# Altium PCB betrusted_evtx.PcbDoc (part 1 of 2)
Units mm, origin at the board's own origin, x right, y up, seen from the top; angles counter-clockwise.
Board outline 66 x 88 mm, 2 copper layers (Top Layer, Bottom Layer), stack 0.781 mm thick; 108 components, 62 nets, 1117 pads, 87 vias.
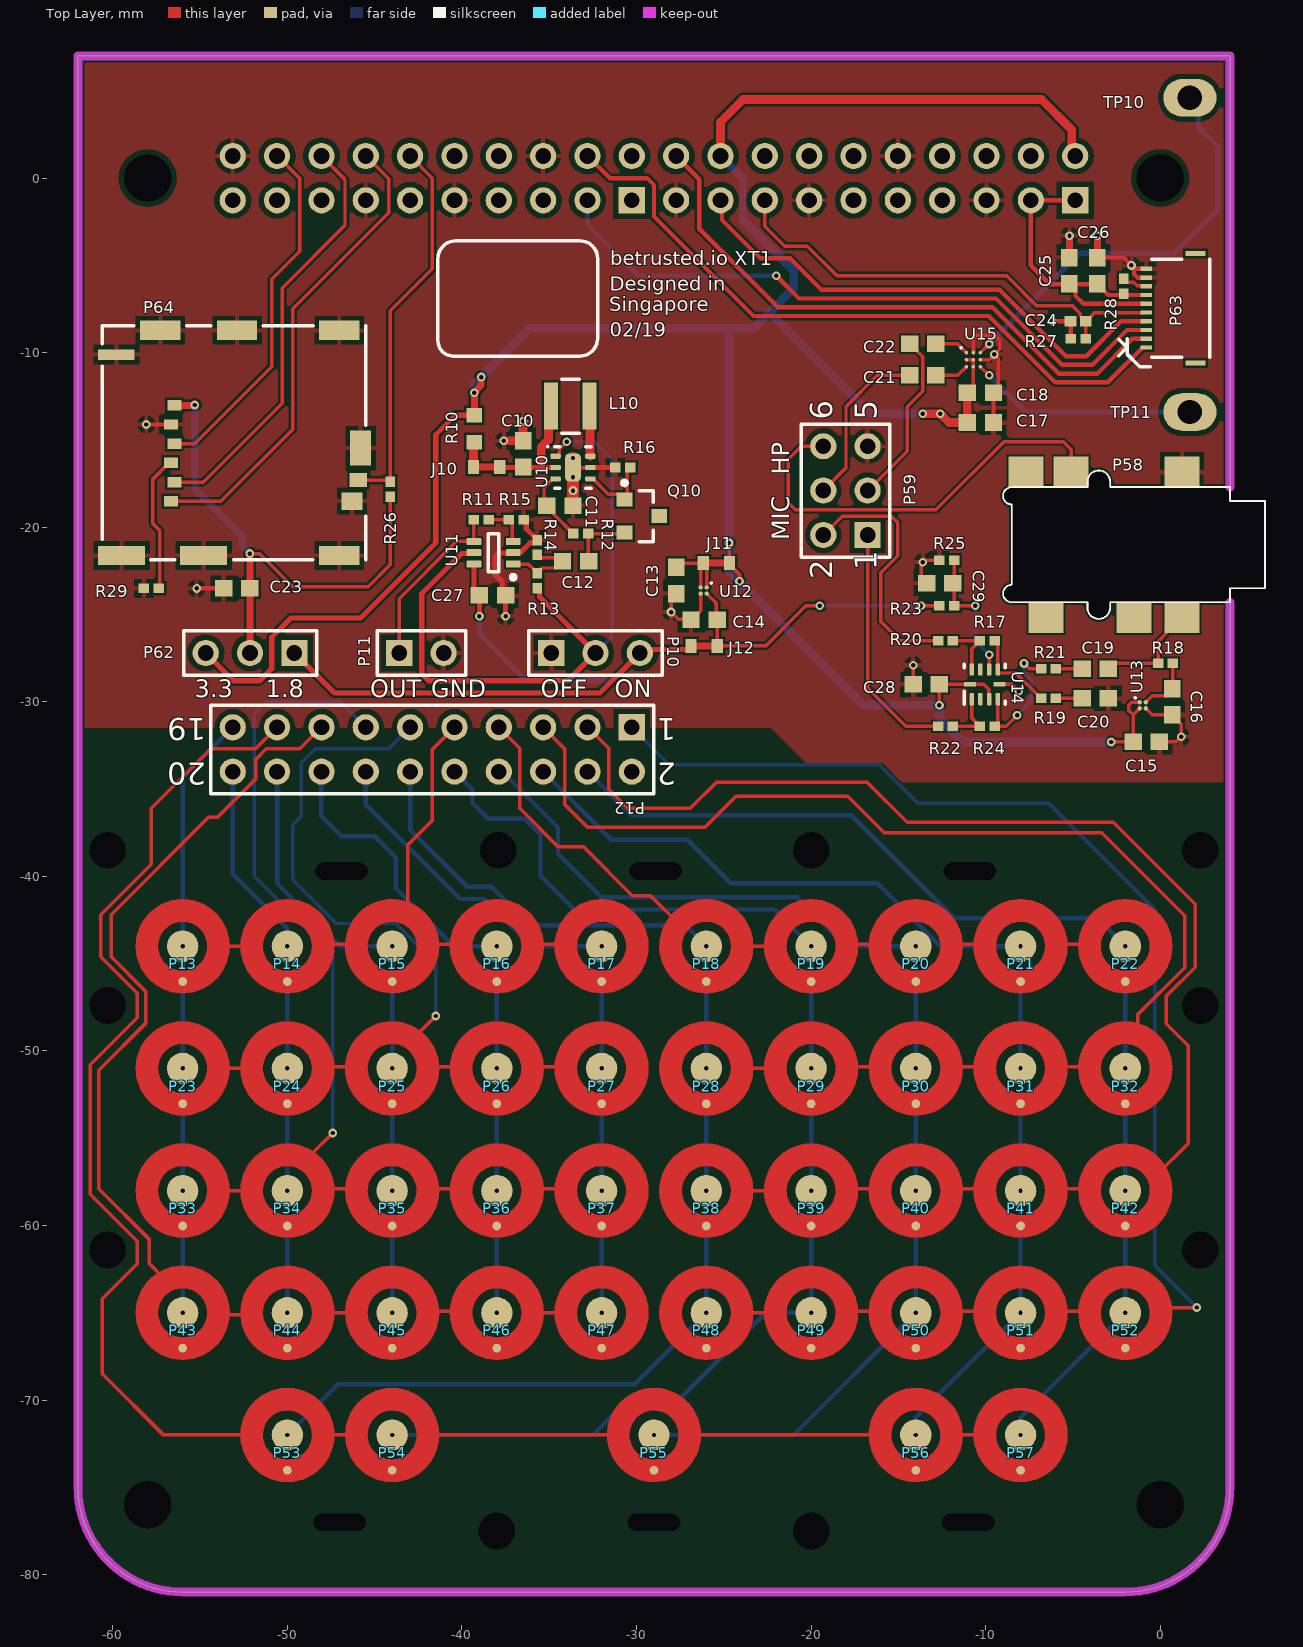
[diagram p0: Top Layer view]
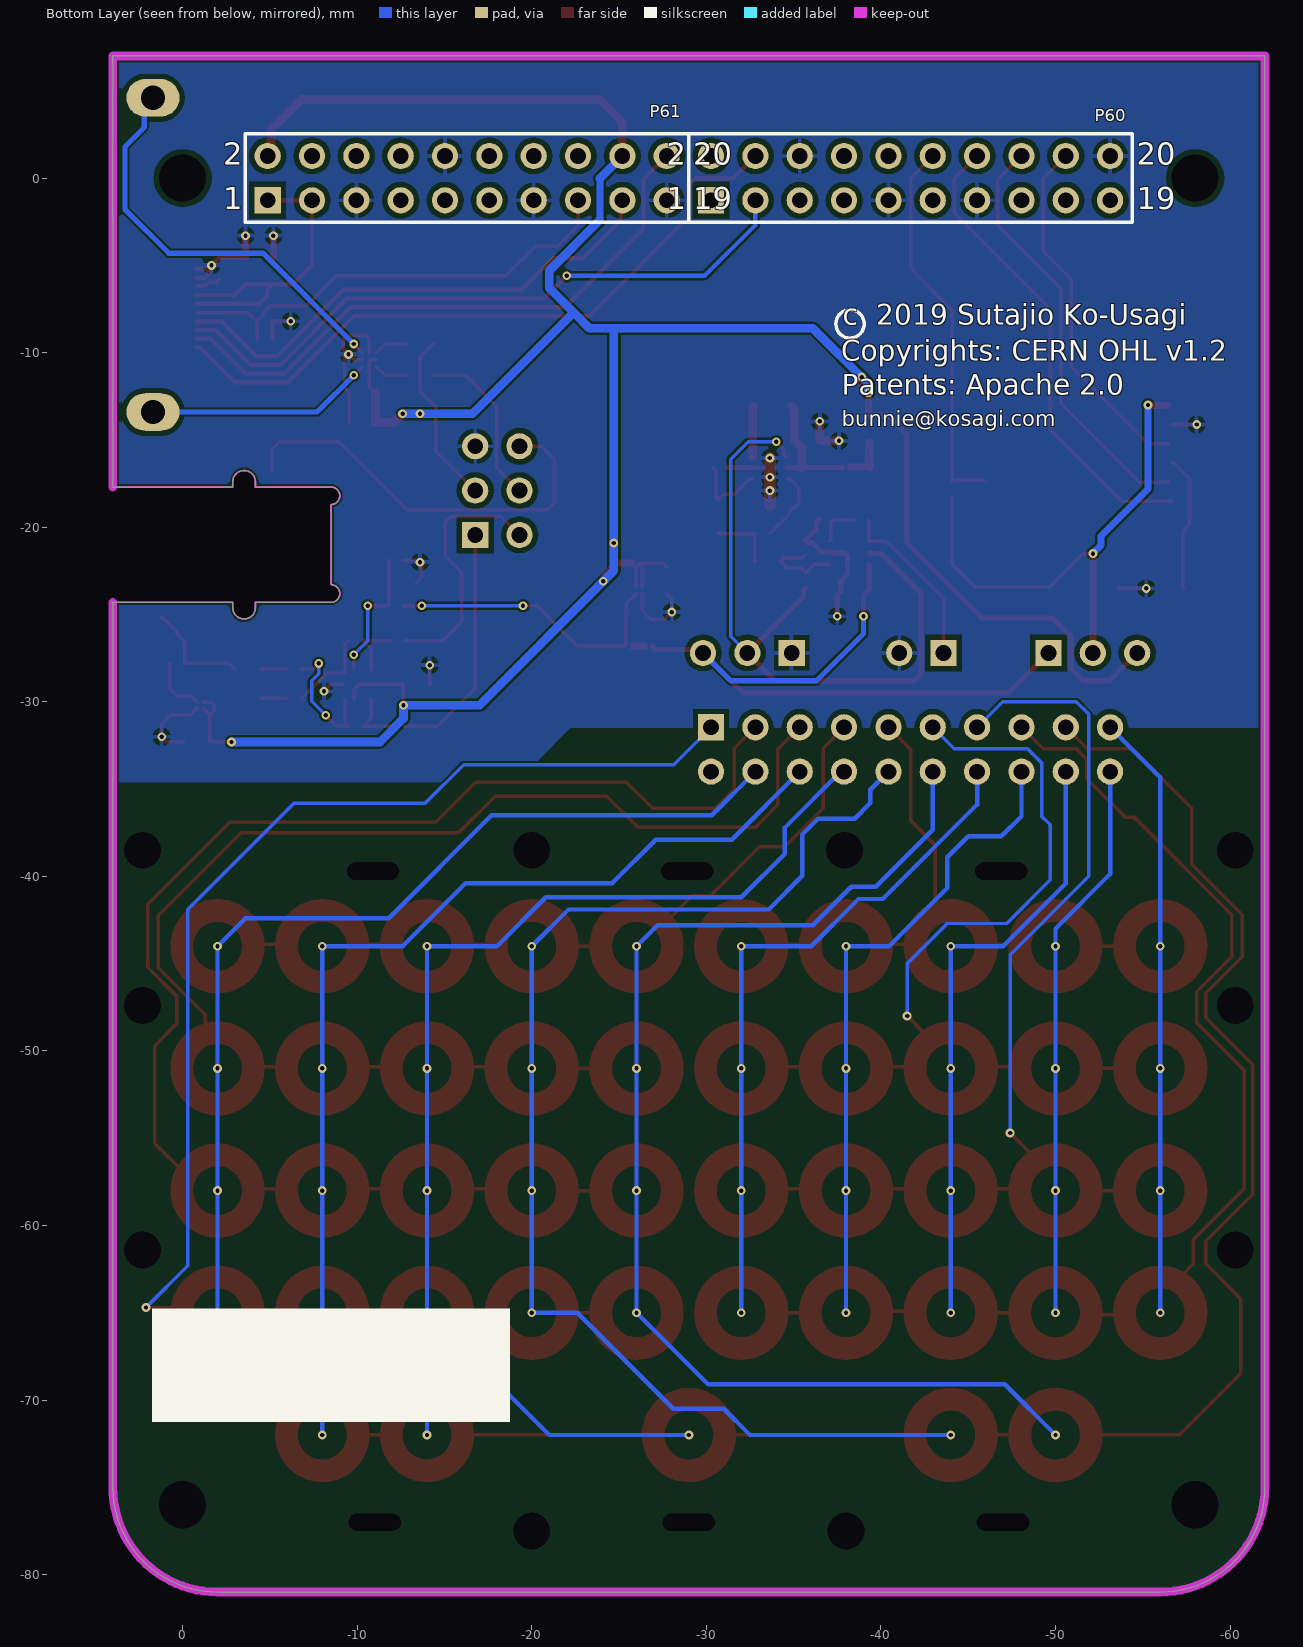
[diagram p1: Bottom Layer view, seen from below]

## Layer stack, top to bottom
Top Solder: solder mask 0.0102, Solder Resist, Dk 3.5
Top Layer: signal copper 0.0356
Dielectric 1: dielectric 0.71, FR-4, Dk 4.8
Bottom Layer: signal copper 0.0356
Bottom Solder: solder mask 0.0102, Solder Resist, Dk 3.5

## Board outline
-62,-75 ccw(c-56,-75) -56,-81 -2,-81 ccw(c-2,-75) 4,-75 4,-24.3 -2.87,-24.3 -2.87,-24.6 cw(c-3.52,-24.6) -4.17,-24.6 -4.17,-24.3 -8.5,-24.3 cw(c-8.5,-23.8) -8.5,-23.3 -8.5,-18.7 cw(c-8.5,-18.2) -8.5,-17.7 -4.17,-17.7 -4.17,-17.4 cw(c-3.52,-17.4) -2.87,-17.4 -2.87,-17.7 4,-17.7 4,7 -62,7

## Design rules (kind name [scope] priority, off if disabled: settings)
Clearance [All] p1: gap=0.125 ignorepadtopadclearanceinfootprint=TRUE except(0.2: Arc-THPad Track-THPad; 0.3: THPad-Fill THPad-Poly THPad-Region)
ComponentClearance [All] p1 off: gap=0.254 collisioncheckmode=3 verticalgap=0.254 showdistances=FALSE
HoleSize [All] p1: absolutevalues=TRUE maxlimit=4 minlimit=0.25 maxpercent=80.000 minpercent=20.000
MinimumSolderMaskSliver [All] p1 off: minsoldermaskwidth=0.1
NetAntennae [All] p1 off: netantennaetolerance=0
PolygonConnect [All] p1: connectstyle=Relief reliefconductorwidth=0.254 reliefentries=4 polygonreliefangle="90 Angle" airgapwidth=0.254
RoomDefinition 02ux [InComponentClass('02ux')] p1 off: confinementstyle=ConfineIn formatcopy=TRUE lockcomponents=FALSE outline 63.153,-75.948 70.646,-75.948 70.646,-43.563 63.153,-43.563
RoomDefinition 01rng [InComponentClass('01rng')] p2 off: confinementstyle=ConfineIn formatcopy=TRUE lockcomponents=FALSE outline 63.153,-87.886 73.821,-87.886 73.821,-77.218 63.153,-77.218
RoutingVias [All] p1: holewidth=0.25 width=0.5 viastyle="Through Hole" minholewidth=0.25 minwidth=0.5 maxholewidth=0.5 maxwidth=1
SilkToSilkClearance [All] p1 off: silktosilkclearance=0.254
SilkToSolderMaskClearance [IsPad] p1 off: minsilkscreentomaskgap=0.254 clearancetoexposedcopper=TRUE
SolderMaskExpansion [All] p1: expansion=0.102
Width [All] p1: maxlimit=2 minlimit=0.15 preferedwidth=0.2 minimp=50.000000 maximp=50.000000 favimp=50.000000
24 further rules are at their usual default settings.

## Classes and differential pairs
component class 02ux: C15 C16 C17 C18 C19 C20 C21 C22 C23 C24 C25 C26 C28 C29 NT10 NT11 P12 P13 P14 P15 P16 P17 P18 P19 P20 P21 P22 P23 P24 P25 P26 P27 P28 P29 P30 P31 P32 P33 P34 P35 P36 P37 P38 P39 P40 P41 P42 P43 P44 P45 P46 P47 P48 P49 P50 P51 P52 P53 P54 P55 P56 P57 P58 P59 P60 P61 P62 P63 P64 R17 R18 R19 R20 R21 R22 R23 R24 R25 R26 R27 R28 R29 TP10 TP11 U13 U14 U15
component class 01rng: C10 C11 C12 C13 C14 C27 J10 J11 J12 L10 P10 P11 Q10 R10 R11 R12 R13 R14 R15 R16 U10 U11 U12

## Components (designator, comment, footprint, x,y, rotation, side; value= is the part's Value field where it differs from the comment)
C10 "10uF, 6.3V, X5R" B_CAP0603 -36.5,-15.8 r90 top
C11 "1uF, 50V, X5R" B_CAP0603 -34.39,-18.76 r0 top
C12 "1uF, 50V, X5R" B_CAP0603 -33.49,-21.96 r180 top
C13 "1uF, 50V, X5R" B_CAP0603 -27.73,-23.05 r270 top
C14 "1uF, 50V, X5R" B_CAP0603 -26.13,-25.3 r180 top
C15 "1uF, 50V, X5R" B_CAP0603 -0.8,-32.3 r0 top
C16 "1uF, 50V, X5R" B_CAP0603 0.7,-30 r270 top
C17 "10uF, 6.3V, X5R" B_CAP0603 -10.3,-14 r0 top
C18 "0.1uF, 6.3V, X5R" B_CAP0603 -10.3,-12.3 r0 top
C19 "1uF, 50V, X5R" B_CAP0603 -3.72,-28.1 r180 top
C20 "1uF, 50V, X5R" B_CAP0603 -3.72,-29.8 r180 top
C21 "0.1uF, 6.3V, X5R" B_CAP0603 -13.6,-11.3 r180 top
C22 "0.1uF, 6.3V, X5R" B_CAP0603 -13.6,-9.5 r0 top
C23 "1uF, 50V, X5R" B_CAP0603 -52.9,-23.5 r180 top
C24 "560pF, NP0" B_CAP0402 -4.7,-8.2 r180 top
C25 "1uF, 50V, X5R" B_CAP0603 -5.2,-5.3 r90 top
C26 "1uF, 50V, X5R" B_CAP0603 -3.6,-5.3 r90 top
C27 "0.1uF, 6.3V, X5R" B_CAP0603 -38.25,-23.9 r180 top
C28 "0.1uF, 6.3V, X5R" B_CAP0603 -13.4,-29 r0 top
C29 "0.1uF, 6.3V, X5R" B_CAP0603 -12.625,-23.2 r0 top
J10 "power tap (DNP)" RESTAP-0603 -38.59,-16.56 r180 top
J11 "power tap (DNP)" RESTAP-0603 -25.42,-22.06 r0 top
J12 "power tap (DNP)" RESTAP-0603 -26.13,-26.8 r0 top
L10 "22uH NRH3012" TAIYO_NRH3012 -33.79,-13.06 r180 top
P10 "Header 3" HDR1X3 -34.89,-27.2 r0 top
P11 "Header 2" HDR1X2 -43.59,-27.2 r0 top
P12 "Header 10X2" HDR2X10 -30.27,-31.46 r180 top
P13 "4mm Dome" 4MM_DOME_SW#1 -56,-44 r0 top
P14 "4mm Dome" 4MM_DOME_SW#1 -50,-44 r0 top
P15 "4mm Dome" 4MM_DOME_SW#2 -44,-44 r0 top
P16 "4mm Dome" 4MM_DOME_SW#1 -38,-44 r0 top
P17 "4mm Dome" 4MM_DOME_SW#1 -32,-44 r0 top
P18 "4mm Dome" 4MM_DOME_SW#2 -26,-44 r0 top
P19 "4mm Dome" 4MM_DOME_SW#1 -20,-44 r0 top
P20 "4mm Dome" 4MM_DOME_SW#1 -14,-44 r0 top
P21 "4mm Dome" 4MM_DOME_SW#1 -8,-44 r0 top
P22 "4mm Dome" 4MM_DOME_SW#1 -2,-44 r0 top
P23 "4mm Dome" 4MM_DOME_SW#1 -56,-51 r0 top
P24 "4mm Dome" 4MM_DOME_SW#1 -50,-51 r0 top
P25 "4mm Dome" 4MM_DOME_SW#2 -44,-51 r0 top
P26 "4mm Dome" 4MM_DOME_SW#1 -38,-51 r0 top
P27 "4mm Dome" 4MM_DOME_SW#1 -32,-51 r0 top
P28 "4mm Dome" 4MM_DOME_SW#1 -26,-51 r0 top
P29 "4mm Dome" 4MM_DOME_SW#2 -20,-51 r0 top
P30 "4mm Dome" 4MM_DOME_SW#2 -14,-51 r0 top
P31 "4mm Dome" 4MM_DOME_SW#1 -8,-51 r0 top
P32 "4mm Dome" 4MM_DOME_SW#2 -2,-51 r0 top
P33 "4mm Dome" 4MM_DOME_SW#1 -56,-58 r0 top
P34 "4mm Dome" 4MM_DOME_SW#2 -50,-58 r0 top
P35 "4mm Dome" 4MM_DOME_SW#1 -44,-58 r0 top
P36 "4mm Dome" 4MM_DOME_SW#1 -38,-58 r0 top
P37 "4mm Dome" 4MM_DOME_SW#1 -32,-58 r0 top
P38 "4mm Dome" 4MM_DOME_SW#1 -26,-58 r0 top
P39 "4mm Dome" 4MM_DOME_SW#1 -20,-58 r0 top
P40 "4mm Dome" 4MM_DOME_SW#1 -14,-58 r0 top
P41 "4mm Dome" 4MM_DOME_SW#1 -8,-58 r0 top
P42 "4mm Dome" 4MM_DOME_SW#3 -2,-58 r0 top
P43 "4mm Dome" 4MM_DOME_SW#1 -56,-65 r0 top
P44 "4mm Dome" 4MM_DOME_SW#2 -50,-65 r0 top
P45 "4mm Dome" 4MM_DOME_SW#1 -44,-65 r0 top
P46 "4mm Dome" 4MM_DOME_SW#1 -38,-65 r0 top
P47 "4mm Dome" 4MM_DOME_SW#1 -32,-65 r0 top
P48 "4mm Dome" 4MM_DOME_SW#1 -26,-65 r0 top
P49 "4mm Dome" 4MM_DOME_SW#1 -20,-65 r0 top
P50 "4mm Dome" 4MM_DOME_SW#1 -14,-65 r0 top
P51 "4mm Dome" 4MM_DOME_SW#1 -8,-65 r0 top
P52 "4mm Dome" 4MM_DOME_SW#2 -2,-65 r0 top
P53 "4mm Dome" 4MM_DOME_SW#1 -50,-72 r0 top
P54 "4mm Dome" 4MM_DOME_SW#2 -44,-72 r0 top
P55 "4mm Dome" 4MM_DOME_SW#2 -29,-72 r0 top
P56 "4mm Dome" 4MM_DOME_SW#2 -14,-72 r0 top
P57 "4mm Dome" 4MM_DOME_SW#1 -8,-72 r0 top
P58 "SJ-43504-SMT-TR" CUI_SJ_43504_SMT_TR 4,-21 r180 top
P59 "Header 3X2" HDR2X3 -16.76,-20.44 r90 top
P60 "Female 10x2 2.54mm header" HDR2X10 -30.27,-1.27 r180 bottom
P61 "Female 10x2 2.54mm header" HDR2X10 -4.87,-1.27 r180 bottom
P62 "Header 3" HDR1X3 -49.6,-27.2 r180 top
P63 "THD0510-10RL-GF" KAWEEI_THD0510_10RL_GF -0.475,-7.45 r90 top
P64 "SIM card holder" MOLEX_504520_0691 -45.88,-8.17 r90 top
Q10 "MMBT2222A" ONSC-SOT-23-3-318-08_V -29.69,-19.36 r0 top
R10 "0 ohm" B_RES0603 -39.29,-14.36 r90 top
R11 "100k, 1%" B_RES0402 -38.89,-19.56 r0 top
R12 "20k, 1%" B_RES0402 -33.19,-20.36 r180 top
R13 "261k, 1%" B_RES0402 -35.69,-23.06 r270 top
R14 "100k, 1%" B_RES0402 -35.69,-21.16 r270 top
R15 "20k, 1%" B_RES0402 -36.89,-19.56 r180 top
R16 "2k, 1%" B_RES0402 -30.79,-16.58 r0 top
R17 "20k, 1%" B_RES0402 -9.9,-26.5 r0 top
R18 "2.2k, 1%" B_RES0402 0.3,-27.8 r0 top
R19 "2k, 1%" B_RES0402 -6.4,-29.8 r0 top
R20 "100, 1%" B_RES0402 -12.3,-26.5 r0 top
R21 "2k, 1%" B_RES0402 -6.4,-28.1 r0 top
R22 "100, 1%" B_RES0402 -12.3,-31.4 r0 top
R23 "261k, 1%" B_RES0402 -12.225,-24.5 r180 top
R24 "20k, 1%" B_RES0402 -9.9,-31.4 r0 top
R25 "100k, 1%" B_RES0402 -12.225,-21.9 r0 top
R26 "20k, 1%" B_RES0402 -44.1,-17.825 r270 top
R27 "20k, 1%" B_RES0402 -4.7,-9.2 r0 top
R28 "2k, 1%" B_RES0402 -2.1,-6.2 r270 top
R29 "DNP" B_RES0402 -57.8,-23.5 r0 top
TP10 "solder terminal (DNP)" 55-MIL-HOLE 1.7,4.6 r180 top
TP11 "solder terminal (DNP)" 55-MIL-HOLE 1.7,-13.4 r180 top
U10 "TPS61158" SON65P200X80_HS-7N -33.64,-16.58 r0 top
U11 "LMV981MG/NOPB" DCK0006A_N -38.19,-21.46 r180 top
U12 "LP5907UVX-1.8/NOPB" TI_YKE004 -26.155,-23.625 r270 top
U13 "LP5907UVX-2.2/NOPB" TI_YKE004 -1,-30.2 r0 top
U14 "THS4531AIRUN" RUN0010A -10.05,-29 r90 top
U15 "TPA2039D1YFF" YFF0009AAAC -10.7,-10.4 r0 top

## Footprints (in the part's own frame and the unit in brackets; to place one, negate y for a bottom-side part, rotate by r counter-clockwise, add the part's x,y. Pads: shape width x height; smd on the part's side, far side on the other; paste and mask are expansions set on the pad)
4MM_DOME_SW#1 [mm] "4mm diameter dome switch footprint"
  round 1.8 smd mask+2.1: 1(0,0)
  round 0.5 smd: 2(0,-2.025)
  Top Layer circle w1.3: c0,0 r2.05
  body extent -2,-2 2,2, height 0.3
4MM_DOME_SW#2 [mm] "4mm diameter dome switch footprint"
  round 1.8 smd mask+2.1: 1(0,0)
  round 0.5 smd: 2(0,-2.025)
  Top Layer lines w1.3: -2.048,0.1 ccw(c0,0) 2.05,0 ccw(c0,0) -2.048,0.1
  body extent -2,-2 2,2, height 0.3
4MM_DOME_SW#3 [mm] "4mm diameter dome switch footprint"
  round 1.8 smd mask+2.1: 1(0,0)
  round 0.5 smd: 2(0,-2.025)
  Top Layer lines w1.3: -2.048,0.1 ccw(c0,0) 2.05,0 ccw(c0,0) 1.828,0.928 ccw(c0,0) -2.048,0.1
  body extent -2,-2 2,2, height 0.3
55-MIL-HOLE [mil] "55 mil solder hole"
  oval 120x85 hole 55: 1(0,0)
B_CAP0402 [mm] "Capacitor 0402"
  rect 0.66x0.62 smd: 1(-0.44,0) 2(0.44,0)
  body extent -0.53,-0.28 0.53,0.27, height 0.55
B_CAP0603 [mm] "Capacitor 0603"
  rect 1x0.95 smd: 1(-0.75,0) 2(0.75,0)
  body extent -0.85,-0.45 0.85,0.45, height 0.9
B_RES0402 [mm] "Resistor 0402"
  rect 0.6x0.55 smd: 1(-0.425,0) 2(0.425,0)
  body extent -0.53,-0.27 0.53,0.28, height 0.4
B_RES0603 [mm] "Resistor 0603"
  rect 0.85x0.9 smd: 1(-0.775,0) 2(0.775,0)
  body extent -0.85,-0.45 0.85,0.45, height 0.55
CUI_SJ_43504_SMT_TR [mm] "3.5mm mid-mount audio jack"
  rect 2x1.75 smd: 1(2.75,4.175) 2(9.1,-4.175) 3(5.5,4.175) 4(2.75,-4.175) 5(11.7,-4.175) 6(10.55,4.175)
  Keep-Out Layer lines w0.1: 0,3.3 6.87,3.3 6.87,3.6 cw(c7.52,3.6) 8.17,3.6 8.17,3.3 12.5,3.3 cw(c12.5,2.8) 12.5,2.3 12.5,-2.3 cw(c12.5,-2.8) 12.5,-3.3 8.17,-3.3 8.17,-3.6 cw(c7.52,-3.6) 6.87,-3.6 6.87,-3.3 0,-3.3
  silkscreen extent -2,-4.25 13,4.25, body extent -2,-4.55 12,4.55, height 1.9
DCK0006A_N [mm] "SOT23, 6-Leads, Body 2.15x1.4mm, Pitch 0.65mm, IPC Medium Density"
  rrect25% 0.85x0.4 smd: 1(-1.125,0.65) 2(-1.125,0) 3(-1.125,-0.65) 4(1.125,-0.65) 5(1.125,0) 6(1.125,0.65)
  silkscreen extent -1.25,-1.1 0.3,1.52, body extent -1.14,-1 1.14,1, height 0.94
HDR1X2 [mm] "Connector; Header; 2 Position"
  rect 1.5x1.5 hole 0.9: 1(0,0)
  round 1.5 hole 0.9: 2(2.54,0)
  silkscreen extent -1.27,-1.27 3.81,1.27
HDR1X3 [mm] "Connector; Header; 3 Position"
  rect 1.5x1.5 hole 0.9: 1(0,0)
  round 1.5 hole 0.9: 2(2.54,0) 3(5.08,0)
  silkscreen extent -1.27,-1.27 6.35,1.27
HDR2X3 [mm] "Connector; Header; 3x2 Position"
  rect 1.5x1.5 hole 0.9: 1(0,0)
  round 1.5 hole 0.9: 2(0,2.54) 3(2.54,0) 4(2.54,2.54) 5(5.08,0) 6(5.08,2.54)
  silkscreen extent -1.27,-1.27 6.35,3.81
HDR2X10 [mm] "Connector; Header; 10x2 Position"
  rect 1.5x1.5 hole 0.9: 1(0,0)
  round 1.5 hole 0.9: 2(0,2.54) 3(2.54,0) 4(2.54,2.54) 5(5.08,0) 6(5.08,2.54) 7(7.62,0) 8(7.62,2.54) 9(10.16,0) 10(10.16,2.54) 11(12.7,0) 12(12.7,2.54) 13(15.24,0) 14(15.24,2.54) 15(17.78,0) 16(17.78,2.54) 17(20.32,0) 18(20.32,2.54) 19(22.86,0) 20(22.86,2.54)
  silkscreen extent -1.27,-1.27 24.13,3.81
KAWEEI_THD0510_10RL_GF [mm] "FPC, 10 pins, 0.5mm pitch, bottom contacts"
  rect 0.3x1.15 smd mask+0.07: 0(-3.135,-2.485) 0(3.135,-2.485)
  rect 0.25x0.65 smd mask+0.07: 1(-2.25,0.325) 2(-1.75,0.325) 3(-1.25,0.325) 4(-0.75,0.325) 5(-0.25,0.325) 6(0.25,0.325) 7(0.75,0.325) 8(1.25,0.325) 9(1.75,0.325) 10(2.25,0.325)
  silkscreen extent -3.35,-3.3 2.8,1.9, body extent -2.8,-3.3 2.8,0.38, height 1
MOLEX_504520_0691 [mm] "Nano Sim Card Connector Bar-Push Tray Type"
  rect 1.1x2.3 smd: 0(-13.45,1.15) 0(-0.55,11.4) 0(-0.55,7) 0(-0.55,1.15)
  rect 1.1x2.7 smd: 0(-13.45,8.92) 0(-13.45,13.62)
  rect 1x1.2 smd: 0(-10.33,0.42)
  rect 2x1.2 smd: 0(-7.3,-0.08)
  rect 0.6x2.1 smd: 0(-1.94,13.92)
  rect 0.6x0.8 smd: C1(-4.845,10.6) C2(-7.045,10.6) C3(-9.245,10.6) C5(-5.945,10.8) C6(-8.145,10.8) C7(-10.345,10.8)
  rect 0.8x1 smd: SW(-9.13,0.05)
  silkscreen extent -13.7,-0.38 -0.3,14.72, body extent -13.7,-0.38 -0.3,14.73, height 1.21
ONSC-SOT-23-3-318-08_V [mm] "SOT23, 3-Leads, Body 2.92x1.3mm, Pitch 0.95mm"
  rect 0.9x0.8 smd: 1(-1,0.95) 2(-1,-0.95) 3(1,0)
  silkscreen extent -1.12,-1.46 0.65,2.02, body extent -0.65,-1.46 0.65,1.46, height 1.11
RESTAP-0603 [mm] "0603 Power tap, cut-trace style"
  rect 0.65x0.8 smd: 1(-0.75,0) 1(0.75,0)
  Top Layer region: -0.5,-0.2 0.5,-0.2 0.5,0.2 -0.5,0.2
  body extent -0.8,-0.4 0.8,0.4, height 0.8
RUN0010A [mm] "QFN, 10-Leads, Body 2.1x2.1mm, Pitch 0.5mm"
  rrect40% 0.7x0.25 smd: 1(-0.85,0.75) 2(-0.85,0.25) 3(-0.85,-0.25) 4(-0.85,-0.75) 6(0.85,-0.75) 7(0.85,-0.25) 8(0.85,0.25) 9(0.85,0.75)
  rrect40% 0.25x0.7 smd: 5(0,-0.85) 10(0,0.85)
  silkscreen extent -1.15,-1.17 1.15,1.17, body extent -1.05,-1.05 1.05,1.05, height 0.81
SON65P200X80_HS-7N [mm] "SON, 6-Leads, Body 2.00x2.00mm, Pitch 0.65mm, Thermal Pad 1.60x0.89mm, IPC Medium Density"
  rrect50% 0.9x0.7 on Top Paste: 0(0,-0.42) 0(0,0.42)
  rrect50% 0.6x0.3 smd mask+0.07: 1(-1,0.65) 2(-1,0) 3(-1,-0.65) 4(1,-0.65) 5(1,0) 6(1,0.65)
  rrect50% 0.9x1.6 smd paste-0.5 mask+0.07: 7(0,0)
  silkscreen extent -1.5,-1.2 1.05,1.25, body extent -1.13,-1.05 1.13,1.05, height 0.8
TAIYO_NRH3012 [mm] "Taiyo Yuden wirewound inductor"
  rect 0.8x2.7 smd: 1(1.1,0) 2(-1.1,0)
  silkscreen extent -0.5,-1.55 0.5,1.55, body extent -1.55,-1.55 1.55,1.55, height 1.19
TI_YKE004 [mm] "DSBGA with SMD pads, 4-Leads, Body 0.65x0.65mmx0.45mm, Pitch 0.35mm"
  round 0.25 smd mask-0.04: A1(-0.175,0.175) A2(0.175,0.175) B1(-0.175,-0.175) B2(0.175,-0.175)
  silkscreen extent -0.48,0.38 -0.38,0.48, body extent -0.33,-0.32 0.32,0.33, height 0.45
YFF0009AAAC [mm] "BGA, 9-Balls, Body 1.214x1.16mm, Pitch 0.4mm"
  round 0.2 smd: A1(-0.4,0.4) A2(0,0.4) A3(0.4,0.4) B1(-0.4,0) B2(0,0) B3(0.4,0) C1(-0.4,-0.4) C2(0,-0.4) C3(0.4,-0.4)
  silkscreen extent -0.76,0.64 -0.66,0.73, body extent -0.61,-0.58 0.61,0.58, height 0.63

## Part data
C10 C17: library part "Cap Semi", "Capacitor (Semiconductor SIM Model)", MPN=CL10A106MQ8NNNC, MYPN=C-106-6.3-X5R-0603, VENDOR=Samsung
C11 C12 C13 C14 C15 C16 C19 C20 C23 C25 C26: library part "Cap Semi", "Capacitor (Semiconductor SIM Model)", MPN=CL10A105KB8NNNC, MYPN=C-105-50-X5R-0603, VENDOR=Samsung
C18 C21 C22 C27 C28 C29: library part "Cap Semi", "Capacitor (Semiconductor SIM Model)", MPN=ANY, MYPN=C-104-6.3-X5R-0603, VENDOR=ANY
C24: library part "Cap Semi", "Capacitor (Semiconductor SIM Model)", MPN=GRM0335C1E561JA01D, MYPN=C-561-25-NP0-0201, VENDOR=Murata
J10 J11 J12: library part CON1, "Connector", MPN=DNP, MYPN=J-TP-PWRTAP-0603, VENDOR=DNP
L10: library part "Inductor Iron", "Magnetic-Core Inductor", MPN=NRH3012T220MN, MYPN=L-NRH3012T220MN, VENDOR="Taiyo Yuden"
P10 P62: "Header, 3-Pin", LatestRevisionDate=17-Jul-2002, LatestRevisionNote="Re-released for DXP Platform.", Publisher="Altium Limited"
P11: "Header, 2-Pin", LatestRevisionDate=17-Jul-2002, LatestRevisionNote="Re-released for DXP Platform.", Publisher="Altium Limited"
P12: "Header, 10-Pin, Dual row", LatestRevisionDate=17-Jul-2002, LatestRevisionNote="Re-released for DXP Platform.", Publisher="Altium Limited"
P13 P14 P15 P16 P17 P18 P19 P20 P21 P22 P23 P24 P25 P26 P27 P28 P29 P30 P31 P32 P33 P34 P35 P36 P37 P38 P39 P40 P41 P42 P43 P44 P45 P46 P47 P48 P49 P50 P51 P52 P53 P54 P55 P56 P57: library part "Header 2", "Header, 2-Pin", LatestRevisionDate=17-Jul-2002, LatestRevisionNote="Re-released for DXP Platform.", Publisher="Altium Limited"
P58: library part CUI_3.5MM_STEREO_MIC, "Mid mount audio jack", MPN=SJ-43504-SMT-TR, MYPN=J-3.5MM-MID-CUI, VENDOR=CUI
P59: "Header, 3-Pin, Dual row", LatestRevisionDate=17-Jul-2002, LatestRevisionNote="Re-released for DXP Platform.", Publisher="Altium Limited"
P60 P61: library part "Header 10X2", "Header, 10-Pin, Dual row", MPN=F201-SGP-D048-20-P4, LatestRevisionDate=17-Jul-2002, LatestRevisionNote="Re-released for DXP Platform.", MYPN=ESW-110-44-L-D, Publisher="Altium Limited", VENDOR=KAWAEEI
P63: library part "Header 10", "Header, 10-Pin", LatestRevisionDate=17-Jul-2002, LatestRevisionNote="Re-released for DXP Platform.", MPN=THD0510-10RL-GF, MYPN=J-FPC-THD0510-10RL-GF, Publisher="Altium Limited", VENDOR=Kaweei
P64: library part SIM_SLOT, MPN=504520-0691, MYPN=J-NANOSIM-MOLEX, VENDOR=MOLEX
Q10: library part ONSC-NPN-B1E2C3-3, MPN=MMBT2222A, MYPN=Q-NPN-BCE-SOT23, VENDOR="Diodes Inc"
R10 R11 R12 R13 R14 R15 R16 R17 R18 R19 R20 R21 R22 R23 R24 R25 R26 R27 R28 R29: library part Res1, "Resistor", MPN=ANY, VENDOR=ANY
  R10: MYPN=R-0R0-1P-1_16W-0603
  R11 R14 R25: MYPN=R-104-1P-1_16W-0402
  R12 R15 R17 R24 R26 R27: MYPN=R-203-1P-1_16W-0402
  R13 R23: MYPN=R-264-1P-1_16W-0402
  R16 R19 R21 R28: MYPN=R-202-1P-1_16W-0402
  R18: MYPN=R-222-1P-1_16W-0402
  R20 R22: MYPN=R-101-1P-1_16W-0402
  R29: MYPN=DNP
TP10 TP11: library part CON1, "Connector"
U10: "30V WLED driver with integrated power diode", MPN=TPS61158DRVR, MYPN=U-TPS61158DRVR, VENDOR=TI
U11: library part CMP-0055-01099-3, "Single 1.8V, RRIO Operational Amplifiers with Shutdown, 6-pin SC-70, Pb-Free", Package Reference=DCK0006A, PackageTopMarking=A77*XTT, PowerWise=N, ComponentLink1Description="Datasheet URL", ComponentLink1URL=http://www.ti.com/general/docs/lit/getliterature.tsp?genericPartNumber=LMV981-N&fileType=pdf, CompType=Amplifiers, MPN=LMV981MG/NOPB, PackageDescription="Molded SC-70, 2 x 1.25 x .9mm, 6 Lead, 0.65mm Pitch", PinCount=6, RoHS=Y, VENDOR="Texas Instruments"
U12 U13: library part LP5907UVX, "Ultra low-noise 250mA LDO for RF and analog in DSBGA", VENDOR=TI
  U12: MPN=LP5907UVX-1.8/NOPB, MYPN=ULP5907UVX-1.8
  U13: MPN=LP5907UVX-2.2/NOPB, MYPN=ULP5907UVX-2.2
U14: library part TI-THS4531X-RUN10, "Ultra Low-Power, RRIO, Fully Differential Amplifier", MPN=THS4531AIRUN(T/R), MYPN=U-THS4531AIRUN, VENDOR=TI
U15: library part TI-TPA20XXD1YFF9, "3.2W Mono Class-D Audio Power Amplifier With 12-dB Gain and Auto Short-Circuit Recovery", MPN=TPA2039D1YFF(T/R), MYPN=U-TPA2039D1YFF, VENDOR=TI

## Free pads (board coordinates)
  round 2.5 hole 2.7 unplated mask+1.5: 0(-58,-76) 0(-58,0) 0(0,-76) 0(0,0)
  rect 0x0 hole 1 slot 3 at 0 deg unplated: 0(-47,-77) 0(-46.9,-39.7) 0(-29,-77) 0(-28.9,-39.7) 0(-11,-77) 0(-10.9,-39.7)
  rect 2.489x0.051 on Bottom Overlay: 1(-43.69,-18.848) 1(-43.69,-18.797) 1(-43.69,-18.747) 1(-41.404,-16.461)
  rect 2.54x0.051 on Bottom Overlay: 1(-43.664,-19.102) 1(-43.664,-19.001) 1(-43.664,-18.95) 1(-43.664,-18.899) 1(-43.664,-18.696) 1(-43.664,-18.594) 1(-43.664,-18.543) 1(-43.664,-18.493) 1(-43.664,-19.051) 1(-43.664,-18.645) 1(-43.563,-18.289) 1(-39.245,-18.289) 1(-39.143,-19.051) 1(-39.143,-19.001) 1(-39.143,-18.95) 1(-39.143,-18.899) 1(-39.143,-18.848) 1(-39.143,-18.797) 1(-39.143,-18.747) 1(-39.143,-18.696) 1(-39.143,-18.645) 1(-39.143,-18.594) 1(-39.143,-18.543) 1(-39.143,-18.493)
  rect 2.591x0.051 on Bottom Overlay: 1(-43.639,-19.153) 1(-43.639,-18.442) 1(-43.639,-18.391) 1(-43.639,-18.34) 1(-43.639,-19.204) 1(-43.588,-19.255) 1(-39.219,-19.255) 1(-39.168,-19.204) 1(-39.168,-18.442) 1(-39.168,-19.153) 1(-39.168,-19.102) 1(-39.168,-18.391)
  rect 0.102x0.051 on Bottom Overlay: 1(-43.563,-16.003) 1(-42.496,-21.236) 1(-40.311,-21.236) 1(-39.245,-16.003)
  rect 0.254x0.051 on Bottom Overlay: 1(-43.537,-21.49) 1(-43.537,-16.054) 1(-42.521,-21.185) 1(-40.286,-21.185) 1(-39.27,-21.49) 1(-39.27,-16.054)
  rect 0.356x0.051 on Bottom Overlay: 1(-43.537,-21.439) 1(-43.537,-16.105) 1(-42.572,-21.134) 1(-40.235,-21.134) 1(-39.27,-16.105)
  rect 0.152x0.051 on Bottom Overlay: 1(-43.537,-21.541) 1(-39.27,-21.541)
  rect 0.457x0.051 on Bottom Overlay: 1(-43.537,-16.156)
  rect 0.508x0.051 on Bottom Overlay: 1(-43.512,-21.388) 1(-39.295,-21.388) 1(-39.295,-16.156)
  rect 0.61x0.051 on Bottom Overlay: 1(-43.512,-21.337) 1(-43.512,-16.207) 1(-39.295,-16.207)
  rect 0.711x0.051 on Bottom Overlay: 1(-43.512,-16.257)
  rect 0.762x0.051 on Bottom Overlay: 1(-43.486,-21.287) 1(-39.321,-21.287) 1(-39.321,-16.257)
  rect 0.864x0.051 on Bottom Overlay: 1(-43.486,-21.236) 1(-43.486,-16.308) 1(-41.404,-15.241) 1(-39.321,-21.236) 1(-39.321,-16.308)
  rect 0.965x0.051 on Bottom Overlay: 1(-43.486,-16.359) 1(-41.404,-15.394) 1(-41.404,-15.343) 1(-41.404,-15.292) 1(-39.321,-16.359)
  rect 1.016x0.051 on Bottom Overlay: 1(-43.461,-21.185) 1(-41.429,-15.445) 1(-39.346,-21.185)
  rect 2.337x0.051 on Bottom Overlay: 1(-43.461,-19.305) 1(-42.699,-17.781) 1(-39.346,-19.305)
  rect 1.219x0.051 on Bottom Overlay: 1(-43.461,-16.461) 1(-41.429,-16.003) 1(-39.346,-16.461)
  rect 1.118x0.051 on Bottom Overlay: 1(-43.461,-16.41) 1(-43.461,-21.134) 1(-41.429,-15.749) 1(-39.346,-16.41) 1(-39.346,-21.134)
  rect 2.286x0.051 on Bottom Overlay: 1(-43.436,-18.239) 1(-40.134,-17.781) 1(-39.422,-18.239)
  rect 2.134x0.051 on Bottom Overlay: 1(-43.309,-19.356) 1(-42.801,-17.832) 1(-40.007,-17.832) 1(-39.499,-19.356)
  rect 1.829x0.051 on Bottom Overlay: 1(-43.258,-20.982) 1(-43.156,-20.728) 1(-43.105,-20.626) 1(-43.105,-19.458) 1(-43.105,-18.137) 1(-43.055,-19.509) 1(-43.055,-18.086) 1(-42.851,-20.067) 1(-42.851,-20.017) 1(-39.956,-20.067) 1(-39.956,-20.017) 1(-39.803,-18.035) 1(-39.753,-20.575) 1(-39.753,-19.509) 1(-39.753,-19.458) 1(-39.753,-18.086) 1(-39.702,-20.677) 1(-39.702,-20.626) 1(-39.702,-18.137) 1(-39.651,-20.728) 1(-39.549,-20.982)
  rect 1.93x0.051 on Bottom Overlay: 1(-43.258,-20.931) 1(-42.953,-19.61) 1(-42.953,-17.934) 1(-42.851,-19.864) 1(-42.851,-19.915) 1(-39.956,-19.915) 1(-39.956,-19.864) 1(-39.854,-17.934) 1(-39.854,-19.61) 1(-39.803,-19.559) 1(-39.549,-20.931)
  rect 2.032x0.051 on Bottom Overlay: 1(-43.258,-18.188) 1(-42.902,-19.712) 1(-42.851,-19.813) 1(-42.851,-19.763) 1(-39.956,-19.813) 1(-39.956,-19.763) 1(-39.956,-19.712) 1(-39.549,-18.188)
  rect 1.778x0.051 on Bottom Overlay: 1(-43.232,-21.033) 1(-43.08,-20.575) 1(-43.029,-20.525) 1(-43.029,-20.474) 1(-42.978,-20.423) 1(-42.928,-20.321) 1(-39.88,-20.321) 1(-39.829,-20.423) 1(-39.778,-20.525) 1(-39.778,-20.474) 1(-39.575,-21.033)
  rect 1.88x0.051 on Bottom Overlay: 1(-43.232,-20.88) 1(-43.232,-20.829) 1(-43.182,-20.779) 1(-43.131,-19.407) 1(-43.131,-20.677) 1(-43.029,-19.559) 1(-43.029,-18.035) 1(-42.978,-17.985) 1(-42.877,-19.966) 1(-39.981,-19.966) 1(-39.829,-17.985) 1(-39.676,-19.407) 1(-39.626,-20.829) 1(-39.626,-20.779) 1(-39.575,-20.88)
  rect 1.676x0.051 on Bottom Overlay: 1(-43.232,-21.083) 1(-42.877,-20.22)
  rect 1.727x0.051 on Bottom Overlay: 1(-42.953,-20.372) 1(-42.902,-20.271) 1(-42.851,-20.169) 1(-42.851,-20.118) 1(-41.429,-16.308) 1(-39.956,-20.22) 1(-39.956,-20.169) 1(-39.956,-20.118) 1(-39.905,-20.271) 1(-39.854,-20.372) 1(-39.6,-21.083)
  rect 1.981x0.051 on Bottom Overlay: 1(-42.928,-19.661) 1(-42.877,-17.883) 1(-41.404,-16.359) 1(-39.93,-17.883) 1(-39.88,-19.661)
  rect 4.674x0.051 on Bottom Overlay: 1(-41.429,-17.324)
  rect 5.08x0.051 on Bottom Overlay: 1(-41.429,-17.019)
  rect 4.877x0.051 on Bottom Overlay: 1(-41.429,-17.172)
  rect 1.27x0.051 on Bottom Overlay: 1(-41.404,-16.207) 1(-41.404,-16.156) 1(-41.404,-16.105) 1(-41.404,-16.054)
  rect 4.826x0.051 on Bottom Overlay: 1(-41.404,-17.731) 1(-41.404,-17.68) 1(-41.404,-17.223)
  rect 4.724x0.051 on Bottom Overlay: 1(-41.404,-17.629) 1(-41.404,-17.273) 1(-41.404,-17.578)
  rect 4.623x0.051 on Bottom Overlay: 1(-41.404,-17.477) 1(-41.404,-17.426) 1(-41.404,-17.375) 1(-41.404,-17.527)
  rect 5.029x0.051 on Bottom Overlay: 1(-41.404,-17.07)
  rect 5.131x0.051 on Bottom Overlay: 1(-41.404,-16.969)
  rect 5.232x0.051 on Bottom Overlay: 1(-41.404,-16.918)
  rect 5.334x0.051 on Bottom Overlay: 1(-41.404,-16.867) 1(-41.404,-16.816)
  rect 5.537x0.051 on Bottom Overlay: 1(-41.404,-16.715) 1(-41.404,-16.664) 1(-41.404,-16.562)
  rect 5.639x0.051 on Bottom Overlay: 1(-41.404,-16.613)
  rect 5.436x0.051 on Bottom Overlay: 1(-41.404,-16.511) 1(-41.404,-16.765)
  rect 1.473x0.051 on Bottom Overlay: 1(-41.404,-16.257)
  rect 1.168x0.051 on Bottom Overlay: 1(-41.404,-15.953) 1(-41.404,-15.902) 1(-41.404,-15.851) 1(-41.404,-15.8)
  rect 1.067x0.051 on Bottom Overlay: 1(-41.404,-15.597) 1(-41.404,-15.546) 1(-41.404,-15.495) 1(-41.404,-15.699) 1(-41.404,-15.648)
  rect 4.928x0.051 on Bottom Overlay: 1(-41.404,-17.121)
  rect 2.184x0.051 on Bottom Overlay: 1(-41.404,-16.41)
  rect 0.203x0.051 on Top Overlay: 1(-40.712,-8.697) 1(-39.747,-7.071) 1(-39.696,-4.684) 1(-39.595,-4.531) 1(-39.29,-5.344) 1(-39.138,-9.713) 1(-38.477,-5.649) 1(-38.325,-7.122) 1(-38.325,-4.836) 1(-38.223,-4.684) 1(-38.172,-4.633) 1(-38.122,-4.531) 1(-38.071,-4.481) 1(-38.02,-4.328) 1(-37.969,-5.293) 1(-37.969,-4.277) 1(-37.918,-5.243) 1(-37.868,-5.192) 1(-37.817,-5.141) 1(-37.563,-4.785) 1(-37.563,-4.735) 1(-37.512,-4.684) 1(-37.461,-4.582) 1(-37.41,-8.595) 1(-37.41,-4.531) 1(-37.41,-4.481) 1(-36.242,-4.887) 1(-36.039,-4.43) 1(-35.48,-4.125) 1(-35.328,-5.954) 1(-35.328,-4.277) 1(-35.277,-4.836) 1(-35.226,-4.785) 1(-35.226,-3.973) 1(-35.175,-4.735) 1(-35.124,-4.684) 1(-35.124,-4.074) 1(-35.074,-4.125) 1(-34.667,-7.122) 1(-34.616,-7.071) 1(-34.616,-5.497) 1(-34.566,-6.97) 1(-34.515,-4.531) 1(-34.464,-5.395) 1(-34.413,-4.684) 1(-34.261,-6.309) 1(-34.261,-5.243) 1(-34.21,-5.192) 1(-34.159,-5.141) 1(-34.108,-5.09) 1(-34.058,-5.039) 1(-34.007,-5.344) 1(-34.007,-4.989) 1(-33.956,-4.938) 1(-33.905,-4.887) 1(-33.854,-4.836) 1(-33.702,-5.598) 1(-33.6,-9.053) 1(-33.55,-7.071) 1(-33.143,-9.053)
  rect 0.254x0.051 on Top Overlay: 1(-40.687,-8.646) 1(-40.636,-8.595) 1(-40.585,-8.545) 1(-40.585,-5.446) 1(-40.535,-8.494) 1(-40.535,-5.395) 1(-40.484,-8.443) 1(-40.433,-8.392) 1(-40.433,-5.344) 1(-40.382,-8.341) 1(-40.331,-5.293) 1(-40.281,-8.189) 1(-40.281,-5.243) 1(-40.23,-8.138) 1(-40.179,-5.192) 1(-40.128,-5.141) 1(-40.077,-5.09) 1(-40.027,-5.039) 1(-39.976,-4.989) 1(-39.823,-4.836) 1(-39.773,-4.785) 1(-39.722,-7.122) 1(-39.722,-4.735) 1(-39.671,-4.633) 1(-39.62,-4.989) 1(-39.62,-4.582) 1(-39.569,-4.481) 1(-39.468,-5.09) 1(-39.417,-5.141) 1(-39.366,-5.192) 1(-39.315,-5.293) 1(-39.315,-5.243) 1(-39.112,-9.662) 1(-38.96,-6.005) 1(-38.401,-5.598) 1(-38.299,-5.547) 1(-38.249,-7.173) 1(-38.249,-5.497) 1(-38.198,-7.224) 1(-38.147,-7.275) 1(-38.147,-5.446) 1(-38.096,-5.395) 1(-38.045,-5.344) 1(-37.995,-4.125) 1(-37.944,-4.227) 1(-37.944,-4.176) 1(-37.487,-4.633) 1(-37.385,-8.545) 1(-37.385,-4.43) 1(-36.623,-7.63) 1(-36.572,-7.579) 1(-36.521,-9.713) 1(-36.521,-4.633) 1(-36.318,-4.785) 1(-36.267,-4.836) 1(-36.267,-4.227) 1(-36.217,-5.547) 1(-36.115,-4.328) 1(-36.064,-4.379) 1(-35.861,-8.341) 1(-35.658,-5.141) 1(-35.607,-5.09) 1(-35.505,-5.039) 1(-35.455,-4.989) 1(-35.404,-4.938) 1(-35.404,-4.176) 1(-35.353,-4.887) 1(-35.353,-4.227) 1(-34.845,-8.138) 1(-34.794,-7.884) 1(-34.794,-7.833) 1(-34.794,-7.783) 1(-34.794,-7.732) 1(-34.794,-7.681) 1(-34.794,-7.63) 1(-34.794,-7.579) 1(-34.591,-7.021) 1(-34.54,-6.919) 1(-34.54,-5.446) 1(-34.489,-6.868) 1(-34.388,-5.344) 1(-34.337,-5.293) 1(-33.981,-8.443) 1(-33.931,-5.395) 1(-33.727,-4.074) 1(-33.626,-4.176) 1(-33.575,-9.002) 1(-33.118,-9.205) 1(-33.118,-9.154) 1(-33.118,-9.103)
  rect 0.102x0.051 on Top Overlay: 1(-40.662,-5.497) 1(-40.458,-4.328) 1(-39.798,-7.021) 1(-39.544,-4.277) 1(-38.579,-5.09) 1(-36.648,-7.681) 1(-36.394,-5.344) 1(-36.394,-5.293) 1(-35.937,-8.392) 1(-35.531,-4.074) 1(-35.277,-4.379) 1(-34.972,-4.481) 1(-34.566,-4.481) 1(-33.702,-5.649) 1(-33.6,-9.103)
  rect 0.305x0.051 on Top Overlay: 1(-40.357,-8.291) 1(-40.306,-8.24) 1(-40.204,-8.087) 1(-40.154,-8.037) 1(-40.103,-7.986) 1(-40.103,-7.935) 1(-40.052,-7.884) 1(-40.001,-7.783) 1(-39.95,-7.732) 1(-39.9,-7.63) 1(-39.544,-5.039) 1(-39.493,-4.43) 1(-38.934,-9.205) 1(-38.934,-9.154) 1(-38.934,-9.103) 1(-38.934,-9.053) 1(-38.934,-9.002) 1(-38.934,-8.951) 1(-38.934,-8.9) 1(-38.934,-8.849) 1(-38.934,-8.799) 1(-38.934,-8.748) 1(-38.934,-8.697) 1(-38.934,-8.646) 1(-38.934,-8.595) 1(-38.934,-8.545) 1(-38.934,-8.494) 1(-38.934,-8.443) 1(-38.934,-8.392) 1(-38.934,-8.341) 1(-38.934,-8.291) 1(-38.934,-8.24) 1(-38.934,-8.189) 1(-38.934,-8.138) 1(-38.934,-8.087) 1(-38.934,-8.037) 1(-38.934,-7.986) 1(-38.934,-7.935) 1(-38.934,-7.884) 1(-38.934,-7.833) 1(-38.934,-7.783) 1(-38.934,-7.732) 1(-38.934,-7.681) 1(-38.934,-7.63) 1(-38.934,-7.579) 1(-38.934,-7.529) 1(-38.934,-7.478) 1(-38.934,-7.427) 1(-38.934,-7.376) 1(-38.934,-7.325) 1(-38.934,-7.275) 1(-38.934,-7.224) 1(-38.934,-7.173) 1(-38.934,-7.122) 1(-38.934,-7.071) 1(-38.934,-7.021) 1(-38.934,-6.97) 1(-38.934,-6.919) 1(-38.934,-6.868) 1(-38.934,-6.817) 1(-38.934,-6.767) 1(-38.934,-6.716) 1(-38.934,-6.665) 1(-38.934,-6.614) 1(-38.934,-6.563) 1(-38.934,-6.513) 1(-38.934,-6.462) 1(-38.934,-6.411) 1(-38.934,-6.36) 1(-38.934,-6.309) 1(-38.934,-6.259) 1(-38.122,-7.325) 1(-38.071,-7.376) 1(-38.02,-7.427) 1(-37.664,-4.989) 1(-37.664,-4.938) 1(-37.41,-8.494) 1(-36.496,-7.529) 1(-36.445,-7.478) 1(-36.344,-4.735) 1(-36.242,-7.325) 1(-35.937,-7.021) 1(-35.937,-5.344) 1(-35.886,-5.293) 1(-35.836,-8.291) 1(-35.836,-8.24) 1(-35.836,-8.189) 1(-35.836,-8.138) 1(-35.836,-7.986) 1(-35.836,-7.935) 1(-35.836,-7.884) 1(-35.836,-7.833) 1(-35.836,-7.783) 1(-35.836,-7.732) 1(-35.836,-7.681) 1(-35.836,-7.63) 1(-35.836,-7.579) 1(-35.836,-7.529) 1(-35.836,-7.478) 1(-35.836,-7.427) 1(-35.836,-7.376) 1(-35.836,-7.325) 1(-35.785,-5.243) 1(-35.734,-5.192) 1(-35.175,-4.023) 1(-35.074,-8.799) 1(-35.023,-8.697) 1(-34.972,-8.595) 1(-34.972,-8.545) 1(-34.921,-8.494) 1(-34.921,-8.443) 1(-34.921,-8.392) 1(-34.87,-8.341) 1(-34.87,-8.291) 1(-34.87,-8.24) 1(-34.87,-8.189) 1(-34.82,-7.986) 1(-34.82,-7.935) 1(-34.769,-7.529) 1(-34.769,-7.478) 1(-34.769,-7.427) 1(-34.769,-7.376) 1(-34.769,-7.325) 1(-34.464,-9.205) 1(-34.464,-9.154) 1(-34.464,-9.103) 1(-34.464,-9.053) 1(-34.464,-9.002) 1(-34.464,-8.951) 1(-34.464,-8.9) 1(-34.464,-8.849) 1(-34.464,-8.799) 1(-34.464,-8.748) 1(-34.464,-8.697) 1(-34.464,-8.646) 1(-34.464,-8.595) 1(-34.464,-8.545) 1(-34.464,-8.494) 1(-34.464,-8.443) 1(-34.464,-8.392) 1(-34.464,-8.341) 1(-34.464,-8.291) 1(-34.464,-8.24) 1(-34.464,-8.189) 1(-34.464,-8.138) 1(-34.464,-6.817) 1(-34.413,-6.767) 1(-34.261,-6.36) 1(-33.702,-5.547) 1(-33.702,-4.684) 1(-33.702,-4.633) 1(-33.6,-8.951) 1(-33.6,-8.9) 1(-33.55,-8.24) 1(-33.55,-8.189) 1(-33.55,-8.138) 1(-33.55,-7.986) 1(-33.55,-7.935) 1(-33.55,-7.884) 1(-33.55,-7.833) 1(-33.55,-7.783) 1(-33.55,-7.732) 1(-33.55,-7.681) 1(-33.55,-7.63) 1(-33.55,-7.579) 1(-33.55,-7.529) 1(-33.55,-7.478) 1(-33.55,-7.427) 1(-33.55,-7.376) 1(-33.55,-7.325) 1(-33.55,-7.122) 1(-33.092,-4.481)
  rect 0.152x0.051 on Top Overlay: 1(-40.281,-4.531) 1(-39.265,-5.395) 1(-39.011,-5.954) 1(-38.553,-5.039) 1(-38.503,-4.989) 1(-38.452,-4.938) 1(-38.401,-4.887) 1(-38.35,-7.071) 1(-38.299,-4.785) 1(-38.147,-4.582) 1(-38.045,-4.074) 1(-37.385,-8.646) 1(-37.385,-4.277) 1(-36.217,-5.598) 1(-36.013,-4.481) 1(-35.353,-5.903) 1(-35.302,-4.328) 1(-35.099,-4.633) 1(-35.048,-4.582) 1(-35.048,-4.176) 1(-34.997,-4.531) 1(-34.032,-8.392) 1(-33.626,-8.291) 1(-33.626,-5.395) 1(-33.626,-5.344) 1(-33.626,-5.293) 1(-33.626,-5.243) 1(-33.626,-5.192) 1(-33.626,-5.141) 1(-33.626,-5.09) 1(-33.626,-5.039) 1(-33.626,-4.989) 1(-33.626,-4.938) 1(-33.626,-4.887) 1(-33.626,-4.836) 1(-33.626,-4.481) 1(-33.626,-4.43) 1(-33.626,-4.379) 1(-33.626,-4.328) 1(-33.626,-4.277) 1(-33.626,-4.227) 1(-33.575,-7.021) 1(-33.118,-9.002) 1(-33.118,-8.951) 1(-33.118,-8.9) 1(-33.118,-8.849) 1(-33.118,-8.799) 1(-33.118,-8.748) 1(-33.118,-8.697) 1(-33.118,-8.646) 1(-33.118,-8.595)
  rect 0.406x0.051 on Top Overlay: 1(-40.255,-4.481) 1(-39.849,-7.529) 1(-39.798,-7.427) 1(-39.747,-7.376) 1(-39.595,-4.328) 1(-39.544,-9.256) 1(-39.087,-9.561) 1(-38.884,-6.157) 1(-37.969,-4.43) 1(-37.868,-7.579) 1(-37.817,-7.63) 1(-37.766,-7.681) 1(-37.715,-7.732) 1(-37.715,-5.09) 1(-37.715,-4.887) 1(-37.664,-7.833) 1(-37.664,-5.039) 1(-37.41,-8.392) 1(-37.41,-8.341) 1(-37.41,-8.291) 1(-36.191,-5.497) 1(-35.582,-9.307) 1(-35.48,-9.256) 1(-35.48,-6.36) 1(-35.429,-9.205) 1(-35.429,-6.309) 1(-35.378,-9.154) 1(-35.378,-6.259) 1(-35.277,-6.055) 1(-34.413,-9.307) 1(-34.362,-9.357) 1(-34.261,-6.411) 1(-33.804,-8.595) 1(-33.753,-8.646) 1(-33.753,-5.446) 1(-33.753,-4.785) 1(-33.702,-8.697) 1(-33.651,-8.799) 1(-33.651,-8.748) 1(-33.092,-9.307)
  rect 0.762x0.051 on Top Overlay: 1(-40.077,-4.43) 1(-39.163,-9.408)
  rect 0.356x0.051 on Top Overlay: 1(-40.027,-7.833) 1(-39.925,-7.681) 1(-39.874,-7.579) 1(-39.823,-7.478) 1(-39.823,-4.887) 1(-39.722,-7.173) 1(-39.112,-9.611) 1(-38.96,-9.256) 1(-38.909,-6.208) 1(-38.909,-6.055) 1(-37.944,-7.478) 1(-37.944,-4.785) 1(-37.893,-7.529) 1(-37.385,-8.443) 1(-36.471,-4.684) 1(-36.369,-7.427) 1(-36.318,-7.376) 1(-36.217,-4.277) 1(-35.963,-7.071) 1(-35.912,-6.97) 1(-35.861,-6.919) 1(-35.81,-6.868) 1(-35.759,-6.817) 1(-35.759,-6.767) 1(-35.709,-6.716) 1(-35.658,-6.665) 1(-35.658,-6.614) 1(-35.607,-6.563) 1(-35.505,-6.411) 1(-35.302,-9.103) 1(-35.302,-6.005) 1(-35.251,-9.053) 1(-35.201,-9.002) 1(-35.201,-8.951) 1(-35.15,-8.9) 1(-35.099,-8.849) 1(-35.048,-8.748) 1(-34.997,-8.646) 1(-34.439,-9.256) 1(-34.388,-6.716) 1(-34.337,-6.665) 1(-33.931,-8.494) 1(-33.88,-8.545) 1(-33.727,-5.497) 1(-33.727,-4.735) 1(-33.677,-4.125) 1(-33.626,-8.849) 1(-33.118,-9.256)
  rect 1.118x0.051 on Top Overlay: 1(-39.95,-4.379)
  rect 0.508x0.051 on Top Overlay: 1(-39.798,-4.938) 1(-39.696,-7.325) 1(-39.696,-7.275) 1(-38.122,-4.735) 1(-37.766,-4.836) 1(-36.293,-9.611) 1(-36.191,-5.446) 1(-36.14,-9.561) 1(-35.988,-9.51) 1(-35.277,-6.106) 1(-34.21,-6.563) 1(-33.092,-9.357)
  rect 0.457x0.051 on Top Overlay: 1(-39.671,-7.224) 1(-38.858,-6.106) 1(-37.69,-7.783) 1(-37.639,-7.884) 1(-37.588,-7.935) 1(-37.537,-8.037) 1(-37.537,-7.986) 1(-37.487,-8.138) 1(-37.487,-8.087) 1(-37.436,-8.24) 1(-37.436,-8.189) 1(-36.42,-9.662) 1(-35.963,-7.122) 1(-35.861,-9.459) 1(-35.759,-9.408) 1(-35.658,-9.357) 1(-35.353,-6.208) 1(-35.302,-6.157) 1(-34.286,-6.614)
  rect 0.66x0.051 on Bottom Overlay: 1(-39.321,-21.337)
  rect 0.406x0.051 on Bottom Overlay: 1(-39.295,-21.439)
  rect 0.965x0.051 on Top Overlay: 1(-39.265,-9.307)
  rect 0.914x0.051 on Top Overlay: 1(-39.239,-9.357) 1(-37.664,-4.379)
  rect 2.642x0.051 on Bottom Overlay: 1(-39.194,-18.34)
  rect 0.61x0.051 on Top Overlay: 1(-39.138,-9.459) 1(-37.512,-4.328) 1(-36.14,-5.395) 1(-34.261,-4.633)
  rect 0.559x0.051 on Top Overlay: 1(-39.112,-9.51)
  rect 0.051x0.051 on Top Overlay: 1(-38.503,-5.7) 1(-38.35,-7.021) 1(-35.048,-4.227) 1(-34.642,-5.547) 1(-34.286,-6.259) 1(-34.032,-5.293)
  rect 1.727x0.051 on Top Overlay: 1(-34.87,-6.462) 1(-33.702,-9.408)
  rect 2.997x0.051 on Top Overlay: 1(-34.845,-7.275) 1(-34.794,-7.224)
  rect 1.778x0.051 on Top Overlay: 1(-34.845,-6.513) 1(-33.727,-4.582)
  rect 2.946x0.051 on Top Overlay: 1(-34.769,-7.173)
  rect 2.591x0.051 on Top Overlay: 1(-34.693,-8.087) 1(-34.693,-8.037)
  rect 1.372x0.051 on Top Overlay: 1(-33.727,-9.611)
  rect 1.473x0.051 on Top Overlay: 1(-33.727,-9.561)
  rect 1.676x0.051 on Top Overlay: 1(-33.727,-9.459)
  rect 1.626x0.051 on Top Overlay: 1(-33.702,-9.51)
  rect 1.27x0.051 on Top Overlay: 1(-33.524,-4.531)
  rect 0x0 hole 2.1 unplated: 2(-20,-77.5) 3(-38,-77.5) 4(-37.914,-38.5) 5(-20,-38.5) 6(-60.3,-47.4) 6(-60.3,-38.5) 6(2.3,-47.4) 6(2.3,-38.5) 7(-60.3,-61.4) 7(2.3,-61.4)

## Via types
v1: diameter 0.5, hole 0.25, Top Layer to Bottom Layer, tented both sides, 85 vias
v2: diameter 0.5, hole 0.25, Top Layer to Bottom Layer, tented top, 2 vias